# Altium PCB Proto Programmation Arduino 2.PCBDOC
Units mm, origin at the board's own origin, x right, y up, seen from the top; angles counter-clockwise.
Board outline 299.72 x 199.9 mm, 2 copper layers (Top Layer, Bottom Layer); 42 components, 65 nets, 263 pads, 17 vias.
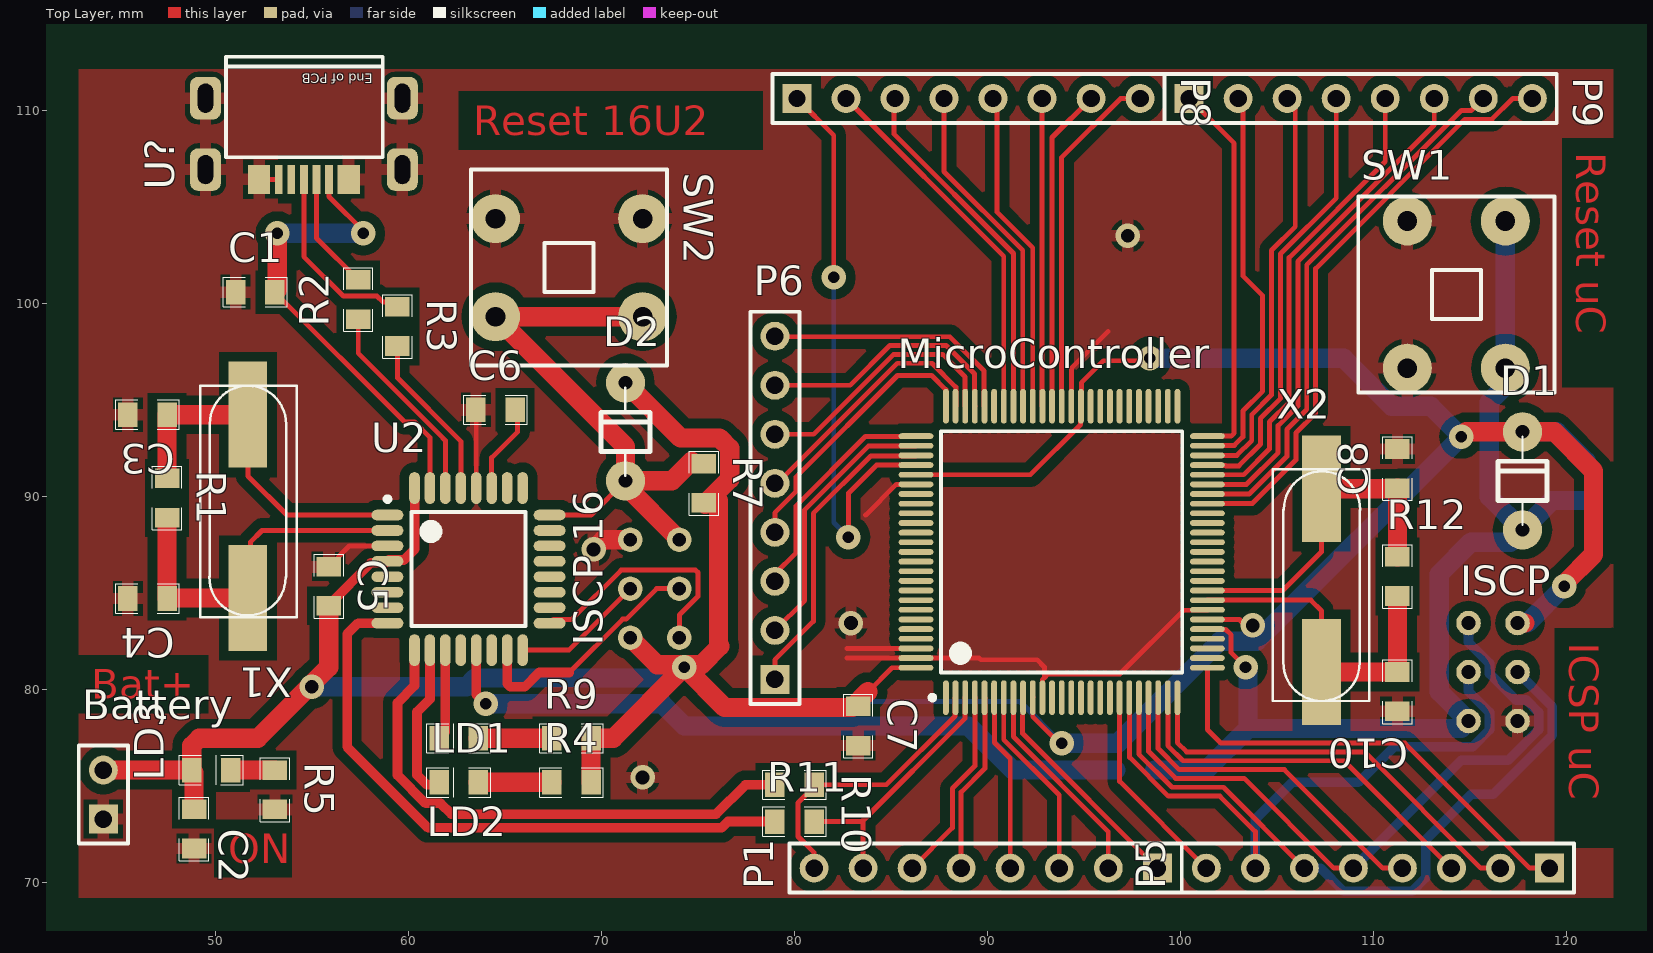
[diagram p0: Top Layer view]
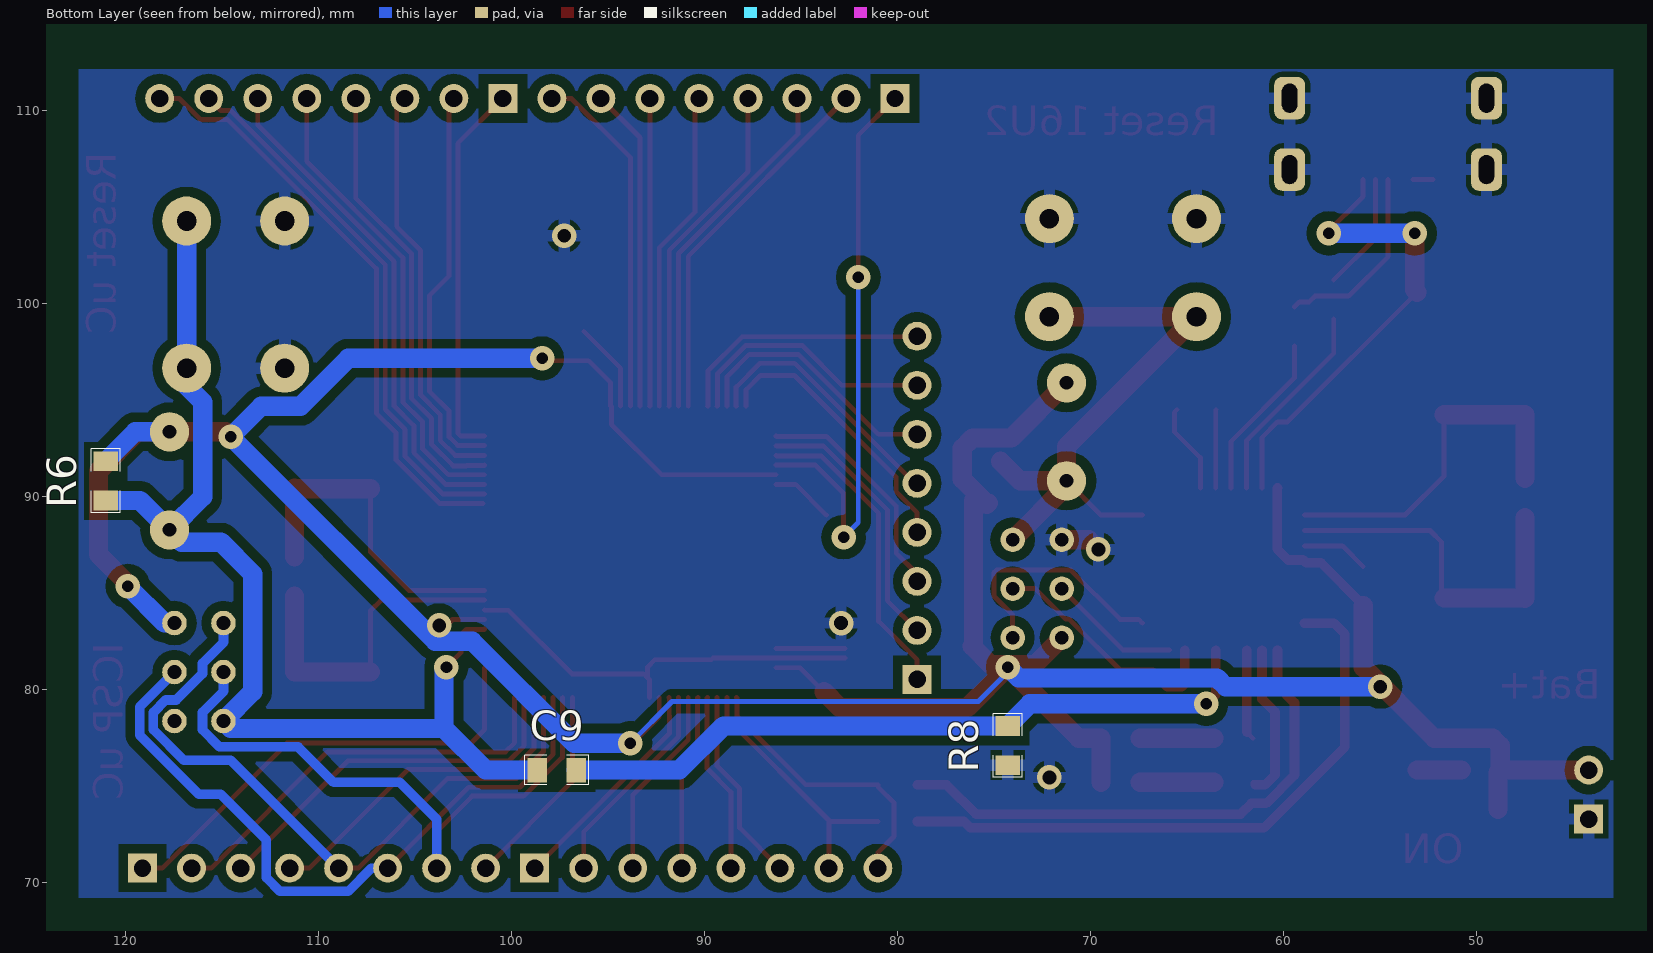
[diagram p1: Bottom Layer view, seen from below]

## Layer stack, top to bottom
Top Solder: solder mask 0.0102, Solder Resist, Dk 3.5
Top Layer: signal copper 0.0356
Dielectric1: dielectric 0.32, FR-4, Dk 4.8
Bottom Layer: signal copper 0.0356
Bottom Solder: solder mask 0.0102, Solder Resist, Dk 3.5

## Board outline
-20.497,-23.403 279.223,-23.403 279.223,176.495 -20.497,176.495

## Design rules (kind name [scope] priority, off if disabled: settings)
Clearance Clearance_bottom_polygon [OnLayer('Bottom Layer') Or OnLayer('Multi-Layer') vs OnLayer('Bottom Layer')  And  InPoly] p1: gap=0.508
Clearance Clearance_top_polygon [OnLayer('Top Layer')  Or OnLayer('Multi-Layer') vs OnLayer('Top Layer') And InPoly] p2: gap=0.508
Clearance Clearance_bottom [OnLayer('Bottom Layer') Or OnLayer('Multi-Layer') vs OnLayer('Bottom Layer')  And Not InPoly] p3: gap=0.203
Clearance Clearance_top [OnLayer('Top Layer')  Or OnLayer('Multi-Layer') vs OnLayer('Top Layer') And Not InPoly] p4: gap=0.203
Clearance Clearance_pad_to_pad [OnLayer('Multi-Layer') vs OnLayer('Multi-Layer')] p5: gap=0.254
ComponentClearance ComponentClearance_bottom [OnLayer('Bottom Overlay') vs OnLayer('Bottom Overlay')] p1: gap=0 collisioncheckmode=3 verticalgap=0.254 showdistances=FALSE
ComponentClearance ComponentClearance_top [OnLayer('Top Overlay') vs OnLayer('Top Overlay')] p2: gap=0 collisioncheckmode=3 verticalgap=0.254 showdistances=FALSE
FabricationTestPointUsage TestPointUsage [All] p1: valid=0 allowmultiple=FALSE
FabricationTestpoint Testpoint [All] p1: side=3 testpointundercomponent=TRUE minsize=1.016 maxsize=2.54 preferedsize=1.524 minholesize=0 maxholesize=1.016 preferedholesize=0.813 testpointgrid=0.025 allowsidetop=TRUE allowsidebottom=TRUE usegrid=TRUE gridtolerance=0
HoleSize [All] p1: absolutevalues=TRUE maxlimit=25.4 minlimit=0.406 maxpercent=80.000 minpercent=20.000
MinimumAnnularRing [PadXSize_AllLayers = PadYSize_AllLayers] p1: minimumring=0.203
PermittedLayers [All] p1: toplayerpermitted=TRUE bottomlayerpermitted=TRUE
PolygonConnect [All] p1: connectstyle=Relief reliefconductorwidth=0.61 reliefentries=4 polygonreliefangle="90 Angle" airgapwidth=0.254
RoutingVias [All] p1: holewidth=0.406 width=0.813 viastyle="Through Hole" minholewidth=0.4 minwidth=0.8 maxholewidth=0.6 maxwidth=10
SMDToPlane [All] p1: distance=0
SolderMaskExpansion [All] p1: expansion=0.102
ViasUnderSMD [All] p1: allowed=FALSE
Width Width_botom_top [OnLayer('Bottom Layer') or OnLayer('Top Layer')] p1: maxlimit=254 minlimit=0.254 preferedwidth=0.813 minimp=50.000000 maximp=50.000000 favimp=50.000000
25 further rules are at their usual default settings.

## Components (designator, comment, footprint, x,y, rotation, side; value= is the part's Value field where it differs from the comment)
Battery "Header 2" HDR1X2 44.196,73.279 r90 top
C1 "CAP" 0805 51.054,100.584 r0 top
C2 "CAP" 0805 48.895,73.787 r270 top
C3 "CAP" 0805 47.498,94.234 r180 top
C4 "CAP" 0805 47.498,84.709 r180 top
C5 "CAP" 0805 55.88,86.36 r270 top
C6 "CAP" 0805 63.5,94.488 r0 top
C7 "CAP" 0805 83.312,79.121 r270 top
C8 "CAP" 0805 111.252,90.424 r90 top
C9 "CAP" 0805 98.679,75.819 r180 bottom
C10 "CAP" 0805 111.252,80.899 r270 top
D1 "comment" DIODE0.2 117.729,88.265 r90 top
D2 "comment" DIODE0.2 71.247,90.805 r90 top
ISCP "ISCP Arduino" "Prog Arduino" 114.935,83.439 r0 top
"ISCP 16" "ISCP Arduino" "Prog Arduino" 74.041,82.677 r180 top
LD1 "Yellow" LED0805 61.595,75.184 r0 top
LD2 "Yellow" LED0805 61.595,77.47 r0 top
LD3 "Yellow" LED0805 50.8,75.819 r180 top
MicroController "ATmega2560-16AU" 100A_N 93.853,87.122 r90 top
P1 "Header 8" HDR1X8 98.806,70.739 r180 top
P5 "Header 8" HDR1X8 119.126,70.739 r180 top
P6 "Header 8" HDR1X8 78.994,80.518 r90 top
P8 "Header 8" HDR1X8 80.137,110.617 r0 top
P9 "Header 8" HDR1X8 100.457,110.617 r0 top
R1 "RES" 0805 47.498,90.932 r270 top
R2 "RES" 0805 57.404,99.187 r90 top
R3 "RES" 0805 59.436,99.822 r270 top
R4 "RES" 0805 67.437,75.184 r0 top
R5 "RES" 0805 53.086,75.819 r270 top
R6 "RES" 0805 121.031,89.789 r90 bottom
R7 "RES" 0805 75.311,91.694 r270 top
R8 "RES" 0805 74.295,76.073 r90 bottom
R9 "RES" 0805 67.437,77.47 r0 top
R10 "RES" 0805 78.994,75.057 r0 top
R11 "RES" 0805 78.994,73.152 r0 top
R12 "RES" 0805 111.252,84.836 r90 top
SW1 "SW_PB" KSA 111.76,104.267 r0 top
SW2 "SW_PB" KSA 72.136,104.394 r270 top
U2 "ATmega16U2-AU" 32A_N 63.119,86.233 r0 top
U? "USB microB" "USB micro B connector" 59.69,106.934 r180 top
X1 "16MHz" HC-49S-SMD 51.689,94.234 r270 top
X2 "16MHz" HC-49S-SMD 107.315,80.899 r90 top

## Footprints (in the part's own frame and the unit in brackets; to place one, negate y for a bottom-side part, rotate by r counter-clockwise, add the part's x,y. Pads: shape width x height; smd on the part's side, far side on the other; paste and mask are expansions set on the pad)
32A_N [mm] "Thin QFP, 32-Leads, Body 7x7mm, Pitch 0.8mm, IPC Medium Density"
  oval 1.65x0.55 smd: 1(-4.2,2.8) 2(-4.2,2) 3(-4.2,1.2) 4(-4.2,0.4) 5(-4.2,-0.4) 6(-4.2,-1.2) 7(-4.2,-2) 8(-4.2,-2.8) 17(4.2,-2.8) 18(4.2,-2) 19(4.2,-1.2) 20(4.2,-0.4) 21(4.2,0.4) 22(4.2,1.2) 23(4.2,2) 24(4.2,2.8)
  oval 0.55x1.65 smd: 9(-2.8,-4.2) 10(-2,-4.2) 11(-1.2,-4.2) 12(-0.4,-4.2) 13(0.4,-4.2) 14(1.2,-4.2) 15(2,-4.2) 16(2.8,-4.2) 25(2.8,4.2) 26(2,4.2) 27(1.2,4.2) 28(0.4,4.2) 29(-0.4,4.2) 30(-1.2,4.2) 31(-2,4.2) 32(-2.8,4.2)
  silkscreen extent -4.32,-2.95 2.95,3.75, body extent -3.5,-3.5 3.5,3.5, height 1.2
100A_N [mm] "Thin QFP, 100-Leads, Body 14x14mm, Pitch 0.5mm, IPC Medium Density"
  oval 1.8x0.3 smd: 1(-7.55,6) 2(-7.55,5.5) 3(-7.55,5) 4(-7.55,4.5) 5(-7.55,4) 6(-7.55,3.5) 7(-7.55,3) 8(-7.55,2.5) 9(-7.55,2) 10(-7.55,1.5) 11(-7.55,1) 12(-7.55,0.5) 13(-7.55,0) 14(-7.55,-0.5) 15(-7.55,-1) 16(-7.55,-1.5) 17(-7.55,-2) 18(-7.55,-2.5) 19(-7.55,-3) 20(-7.55,-3.5) 21(-7.55,-4) 22(-7.55,-4.5) 23(-7.55,-5) 24(-7.55,-5.5) 25(-7.55,-6) 51(7.55,-6) 52(7.55,-5.5) 53(7.55,-5) 54(7.55,-4.5) 55(7.55,-4) 56(7.55,-3.5) 57(7.55,-3) 58(7.55,-2.5) 59(7.55,-2) 60(7.55,-1.5) 61(7.55,-1) 62(7.55,-0.5) 63(7.55,0) 64(7.55,0.5) 65(7.55,1) 66(7.55,1.5) 67(7.55,2) 68(7.55,2.5) 69(7.55,3) 70(7.55,3.5) 71(7.55,4) 72(7.55,4.5) 73(7.55,5) 74(7.55,5.5) 75(7.55,6)
  oval 0.3x1.8 smd: 26(-6,-7.55) 27(-5.5,-7.55) 28(-5,-7.55) 29(-4.5,-7.55) 30(-4,-7.55) 31(-3.5,-7.55) 32(-3,-7.55) 33(-2.5,-7.55) 34(-2,-7.55) 35(-1.5,-7.55) 36(-1,-7.55) 37(-0.5,-7.55) 38(0,-7.55) 39(0.5,-7.55) 40(1,-7.55) 41(1.5,-7.55) 42(2,-7.55) 43(2.5,-7.55) 44(3,-7.55) 45(3.5,-7.55) 46(4,-7.55) 47(4.5,-7.55) 48(5,-7.55) 49(5.5,-7.55) 50(6,-7.55) 76(6,7.55) 77(5.5,7.55) 78(5,7.55) 79(4.5,7.55) 80(4,7.55) 81(3.5,7.55) 82(3,7.55) 83(2.5,7.55) 84(2,7.55) 85(1.5,7.55) 86(1,7.55) 87(0.5,7.55) 88(0,7.55) 89(-0.5,7.55) 90(-1,7.55) 91(-1.5,7.55) 92(-2,7.55) 93(-2.5,7.55) 94(-3,7.55) 95(-3.5,7.55) 96(-4,7.55) 97(-4.5,7.55) 98(-5,7.55) 99(-5.5,7.55) 100(-6,7.55)
  silkscreen extent -7.67,-6.25 6.25,6.82, body extent -7,-7 7,7, height 1.2
0805 [mil]
  rect 40x50 smd: 1(0,0) 2(80,0)
  silkscreen extent -25,-30 105,30
DIODE0.2 [mil]
  round 80 hole 28: A(0,0) K(200,0)
  silkscreen extent 10,-50 190,50
HC-49S-SMD [mm] "SMD quartz crystal"
  rect 5.5x2 smd: 1(0,0) 2(9.5,0)
  silkscreen extent -1.5,-2.48 10.5,2.52
HDR1X2 [mm] "Connector; Header; 2 Position"
  rect 1.5x1.5 hole 0.9: 1(0,0)
  round 1.5 hole 0.9: 2(2.54,0)
  silkscreen extent -1.27,-1.27 3.81,1.27
HDR1X8 [mm] "Connector; Header; 8 Position"
  rect 1.5x1.5 hole 0.9: 1(0,0)
  round 1.5 hole 0.9: 2(2.54,0) 3(5.08,0) 4(7.62,0) 5(10.16,0) 6(12.7,0) 7(15.24,0) 8(17.78,0)
  silkscreen extent -1.27,-1.27 19.05,1.27
KSA [mil]
  round 100 hole 40: 1(200,-300) 2(200,0) 3(0,0) 4(0,-300)
  silkscreen extent -100,-350 300,50
LED0805 [mil]
  rect 40x50 smd: A(80,0) K(0,0)
  silkscreen extent -25,-30 105,30
"Prog Arduino" [mm]
  round 1.27 hole 0.711 paste+0 mask+0.05: 1(0,0) 2(2.54,0) 3(0,-2.54) 4(2.54,-2.54) 5(0,-5.08) 6(2.54,-5.08)
"USB micro B connector" [mm]
  rect 0.4x1.5 smd paste+0 mask+0.05: 1(3.8,0.508) 2(4.45,0.508) 3(5.1,0.508) 4(5.75,0.508) 5(6.4,0.508)
  rrect50% 1.6x2.2 hole 0.8 slot 1.5 at 90 deg paste+0 mask+0.05: 6(0,0) 7(0,-3.7) 8(10.2,-3.7) 9(10.2,0)
  rect 1.15x1.5 smd paste+0 mask+0.05: 10(2.775,0.508) 11(7.425,0.508)
  silkscreen extent 1.02,-5.84 9.14,-0.63

## Part data
Battery: "Header, 2-Pin"
C1 C2 C3 C4 C5 C6 C7 C8 C9 C10: "capacité non polarisée"
D1 D2: library part JUNCTION_DIODE, "diode usage général"
ISCP "ISCP 16": "Programmation Port For Arduino"
LD1 LD2 LD3: library part LED, "LED 5mm/3mm/CMS"
MicroController: "8-bit AVR Microcontroller, 4.5-5.5V, 256KB Flash, 4KB EEPROM, 8KB SRAM, 86 GPIO pins, 100-pin TQFP, Industrial Grade (-40°C to 85°C), Pb-Free"
P1 P5 P6 P8 P9: "Header, 8-Pin"
R1 R2 R3 R4 R5 R6 R7 R8 R9 R10 R11 R12: "resistance"
U2: "8-bit AVR Microcontroller, 2.7-5.5V, 16KB Flash, 512 Bytes EEPROM, 512 Bytes SRAM, 32-pin TQFP, Industrial Grade (-40°C to 85°C)"
U?: "Usb female connector SMD micro B"
X1 X2: library part XTAL, "Quartz"

## Via types
v1: diameter 1.27, hole 0.6, Top Layer to Bottom Layer, 11 vias
v2: diameter 1.27, hole 0.711, Top Layer to Bottom Layer, 6 vias

## Nets (pads, with @x,y where several pads share a name; then routed paths per layer and width w, separated by ;. In a path a pad name is that pad's centre, name@x,y a point inside that pad or via, vN(x,y) a via of type N, cw(c..) or ccw(c..) an arc to the next point about the centre after c; other vN are vias at no path point)
D+: R3.1 U?.3 | length 9.9
  Top Layer w0.254: U?.3 54.59,102.423 56.632,100.381 58.369,100.381 58.674,100.076 59.182,100.076 R3.1
D-: R2.2 U?.2 | length 6.1
  Top Layer w0.254: U?.2 55.24,103.383 R2.2
DTR: C9.2 R8.2 U2.13 | length 37
  Top Layer w0.5: U2.13 63.519,79.737 v1(64.008,79.248)
  Bottom Layer w1: v1(64.008,79.248) 73.152,79.248 R8.2 89.027,78.105 91.313,75.819 C9.2
GND: "ISCP 16.6" Battery.1 C1.1 C2.2 C3.2 C4.2 C5.1 C6.1 C7.2 C8.2 C10.2 ISCP.6 MicroController.11 MicroController.32 MicroController.62 MicroController.81 MicroController.98 MicroController.99 R5.2 R8.1 SW1.3 SW1.4 SW2.3 SW2.4 U2.3 U2.28 U?.5 U?.6 U?.7 U?.8 U?.9 U?.10 U?.11 | length 44.2
  Top Layer w0.254: U?.11 U?.5 ; C5.1 56.953,87.433 U2.3 ; C6.1 63.519,94.469 U2.28 ; 82.716,81.622 MicroController.99 89.574,81.622 89.662,81.534 92.583,81.534 92.964,81.153 92.964,80.612 ; 82.724,82.122 MicroController.98 ; 83.693,89.027 85.288,90.622 MicroController.81 ; MicroController.11 92.853,80.501 92.964,80.612 ; MicroController.62 94.353,96.639 96.266,98.552 ; MicroController.32 101.383,84.102 100.173,84.102 96.873,80.802 93.154,80.802 92.964,80.612
  Top Layer w1: v2(69.596,87.249) 70.104,87.757 71.501,87.757
  other v2: 72.136,75.438 82.931,83.439 97.282,103.505
MISO: ISCP.1 MicroController.22 P5.5 | length 35.8
  Top Layer w0.254: MicroController.22 98.353,76.792 99.757,75.387 103.305,75.387 107.954,70.739 P5.5
  Bottom Layer w0.5: P5.5 114.549,76.322 116.977,76.322 118.563,77.908 118.563,78.81 117.926,79.447 117.388,79.447 116.023,80.812 116.023,81.35 114.935,82.438 ISCP.1
"MISO 16": "ISCP 16.1" U2.17 | length 12.7
  Top Layer w0.254: U2.17 67.514,83.628 68.474,83.628 71.029,86.182 74.879,86.182 75.006,86.055 75.006,84.817 74.041,83.852 74.041,82.677
MOSI: ISCP.4 MicroController.21 P5.6 | length 35.8
  Top Layer w0.254: MicroController.21 97.853,76.645 99.568,74.93 102.235,74.93 P5.6
  Bottom Layer w0.5: P5.6 107.264,70.739 108.468,69.536 112.004,69.536 112.709,70.241 112.709,72.196 115.084,74.571 116.22,74.571 119.266,77.617 119.266,79.101 117.475,80.892 ISCP.4
"MOSI 16": "ISCP 16.4" U2.16 | length 6.9
  Top Layer w0.254: U2.16 68.317,82.033 71.501,85.217
NetC3_1: C3.1 R1.1 U2.1 X1.1 | length 18.7
  Top Layer w0.254: X1.1 51.689,91.059 53.715,89.033 U2.1
  Top Layer w1: R1.1 C3.1 X1.1
NetC4_1: C4.1 R1.2 U2.2 X1.2 | length 18.7
  Top Layer w0.254: X1.2 51.816,84.861 51.816,87.63 52.419,88.233 U2.2
  Top Layer w1: R1.2 C4.1 47.523,84.734 X1.2
NetC6_2: C6.2 U2.27 | length 4.7
  Top Layer w0.254: U2.27 64.319,92.005 65.659,93.345 65.659,94.361 C6.2
NetC8_1: C8.1 MicroController.34 R12.2 X2.2 | length 17.5
  Top Layer w0.254: MicroController.34 105.315,85.122 107.315,87.122 X2.2
  Top Layer w1: X2.2 111.227,90.399 C8.1 R12.2
NetC10_1: C10.1 MicroController.33 R12.1 X2.1 | length 17.2
  Top Layer w0.254: MicroController.33 106.767,84.622 107.315,84.074 X2.1
  Top Layer w1: X2.1 C10.1 R12.1
NetLD1_A: LD1.A R4.1 | length 3.8
  Top Layer w1: LD1.A R4.1
NetLD1_K: LD1.K U2.10 | length 8.2
  Top Layer w0.254: LD1.K@61.468,75.057 LD1.K
  Top Layer w0.5: U2.10 61.119,79.502 60.452,78.835 60.452,75.565 60.96,75.057 LD1.K@61.468,75.057
NetLD2_A: LD2.A R9.1 | length 3.8
  Top Layer w1: LD2.A R9.1
NetLD2_K: LD2.K U2.11 | length 4.7
  Top Layer w0.254: LD2.K LD2.K@61.919,77.794
  Top Layer w0.5: LD2.K@61.919,77.794 U2.11
NetLD3_K: LD3.K R5.1 | length 2.3
  Top Layer w1: LD3.K R5.1
NetMicroController_4: MicroController.4 P1.6 | length 10.2
  Top Layer w0.254: P1.6 88.189,72.822 88.189,74.865 89.353,76.03 MicroController.4
NetMicroController_5: MicroController.5 P1.5 | length 9.3
  Top Layer w0.254: P1.5 88.646,74.676 89.873,75.903 89.873,79.552 MicroController.5
NetMicroController_6: MicroController.6 P1.4 | length 9.2
  Top Layer w0.254: MicroController.6 90.373,79.552 90.373,77.232 91.186,76.419 P1.4
NetMicroController_7: MicroController.7 P1.3 | length 10
  Top Layer w0.254: MicroController.7 90.853,77.399 93.726,74.526 P1.3
NetMicroController_8: MicroController.8 P1.2 | length 10.9
  Top Layer w0.254: MicroController.8 91.353,77.545 96.266,72.632 P1.2
NetMicroController_9: MicroController.9 P1.1 | length 11.7
  Top Layer w0.254: MicroController.9 91.833,79.552 91.833,78.623 91.821,78.611 91.821,77.724 P1.1
NetMicroController_19: MicroController.19 P5.8 | length 10.7
  Top Layer w0.254: MicroController.19 96.853,75.232 P5.8
NetMicroController_23: MicroController.23 P5.4 | length 17.9
  Top Layer w0.254: MicroController.23 98.853,76.938 99.947,75.844 105.388,75.844 110.494,70.739 P5.4
NetMicroController_24: MicroController.24 P5.3 | length 19.8
  Top Layer w0.254: MicroController.24 99.353,77.085 100.136,76.302 108.483,76.302 P5.3
NetMicroController_25: MicroController.25 P5.2 | length 21.8
  Top Layer w0.254: MicroController.25 99.845,79.564 99.845,77.239 100.326,76.759 109.554,76.759 115.574,70.739 P5.2
NetMicroController_26: MicroController.26 P5.1 | length 23.9
  Top Layer w0.254: MicroController.26 101.403,77.921 102.108,77.216 111.637,77.216 118.114,70.739 P5.1
NetMicroController_43: MicroController.43 P9.8 | length 30.7
  Top Layer w0.254: MicroController.43@101.473,89.642 103.739,89.642 105.985,91.888 105.985,93.286 107.01,94.311 107.01,101.803 114.744,109.537 116.144,109.537 117.225,110.617 P9.8
NetMicroController_44: MicroController.44 P9.7 | length 28
  Top Layer w0.254: MicroController.44 103.572,90.122 105.528,92.077 105.528,93.475 106.553,94.501 106.553,101.993 114.554,109.994 115.074,109.994 P9.7
NetMicroController_45: MicroController.45 P9.6 | length 26
  Top Layer w0.254: MicroController.45 103.426,90.622 105.07,92.267 105.07,93.665 106.096,94.69 106.096,102.182 113.157,109.243 P9.6
NetMicroController_46: MicroController.46 P9.5 | length 24.4
  Top Layer w0.254: MicroController.46 103.279,91.122 104.613,92.456 104.613,93.854 105.639,94.879 105.639,102.371 110.617,107.35 P9.5
NetMicroController_47: MicroController.47 P9.4 | length 22.8
  Top Layer w0.254: MicroController.47 101.423,91.602 102.352,91.602 102.375,91.579 103.032,91.579 104.156,92.703 104.156,94.043 105.181,95.069 105.181,102.561 108.077,105.456 P9.4
NetMicroController_48: MicroController.48 P9.3 | length 21.4
  Top Layer w0.254: MicroController.48 102.929,92.122 103.699,92.892 103.699,94.233 104.724,95.258 104.724,102.75 105.953,103.978 105.953,110.201 P9.3
NetMicroController_49: MicroController.49 P9.2 | length 20.5
  Top Layer w0.254: MicroController.49 101.423,92.642 102.802,92.642 103.242,93.082 103.242,94.422 104.267,95.447 104.267,100.399 103.242,101.425 103.242,110.372 P9.2
NetMicroController_50: MicroController.50 P9.1 | length 19.8
  Top Layer w0.254: P9.1 102.784,108.29 102.784,93.271 102.635,93.122 MicroController.50
NetMicroController_63: MicroController.63 P8.8 | length 18.2
  Top Layer w0.254: MicroController.63 93.853,107.565 96.905,110.617 P8.8
NetMicroController_64: MicroController.64 P8.7 | length 16.8
  Top Layer w0.254: MicroController.64 93.353,108.593 P8.7
NetMicroController_65: MicroController.65 P8.6 | length 16
  Top Layer w0.254: P8.6 92.837,94.688 MicroController.65
NetMicroController_66: MicroController.66 P8.5 | length 16.8
  Top Layer w0.254: P8.5 90.505,110.409 90.505,104.729 92.353,102.881 MicroController.66
NetMicroController_67: MicroController.67 P8.4 | length 17.6
  Top Layer w0.254: P8.4 87.757,106.83 91.833,102.754 91.833,94.692 MicroController.67
NetMicroController_68: MicroController.68 P8.3 | length 18.5
  Top Layer w0.254: P8.3 85.159,110.559 85.159,108.781 91.353,102.588 MicroController.68
NetMicroController_69: MicroController.69 P8.2 | length 19.3
  Top Layer w0.254: P8.2 90.853,102.441 MicroController.69
NetMicroController_71: MicroController.71 P6.8 | length 13.4
  Top Layer w0.254: P6.8 79.019,98.273 88.06,98.273 89.833,96.499 89.833,94.692 MicroController.71
NetMicroController_72: MicroController.72 P6.7 | length 13.5
  Top Layer w0.254: P6.7 82.896,95.758 84.954,97.815 87.87,97.815 89.333,96.352 89.333,94.692 MicroController.72
NetMicroController_73: MicroController.73 P6.6 | length 13.6
  Top Layer w0.254: P6.6 81.003,93.218 85.143,97.358 87.681,97.358 88.853,96.186 MicroController.73
NetMicroController_74: MicroController.74 P6.5 | length 13.4
  Top Layer w0.254: P6.5 79.109,90.678 85.332,96.901 87.134,96.901 88.373,95.662 88.373,95.65 ; MicroController.74 88.373,94.692 88.373,95.621
NetMicroController_75: MicroController.75 P6.4 | length 14.4
  Top Layer w0.254: P6.4 78.994,89.15 80.074,90.231 80.074,90.996 85.344,96.266 87.122,96.266 87.853,95.535 MicroController.75
NetMicroController_76: MicroController.76 P6.3 | length 12.1
  Top Layer w0.254: P6.3 78.994,85.978 80.074,87.058 80.074,89.495 83.681,93.102 86.283,93.102 MicroController.76
NetMicroController_77: MicroController.77 P6.2 | length 14
  Top Layer w0.254: P6.2 80.531,84.595 80.531,89.306 83.828,92.602 86.283,92.602 MicroController.77
NetMicroController_78: MicroController.78 P6.1 | length 16
  Top Layer w0.254: P6.1 78.994,81.53 80.989,83.525 80.989,89.117 83.974,92.102 86.283,92.102 MicroController.78
NetMicroController_79: MicroController.79 P8.1 | length 30.2
  Top Layer w0.254: P8.1 82.042,108.712 v1(82.042,101.346) ; v1(82.804,87.884) 82.804,90.17 84.256,91.622 MicroController.79
  Bottom Layer w0.254: v1(82.042,101.346) 82.042,88.646 v1(82.804,87.884)
NetR2_1: R2.1 U2.30 | length 10.6
  Top Layer w0.254: R2.1 57.404,97.421 61.576,93.248 61.576,93.237 61.919,92.894 U2.30
NetR3_2: R3.2 U2.29 | length 8.7
  Top Layer w0.254: R3.2 59.436,96.139 62.738,92.837 62.738,90.452 U2.29
NetR10_1: R10.1 U2.9 | length 27.9
  Top Layer w0.5: U2.9 60.319,80.19 59.436,79.307 59.436,75.559 60.899,74.096 61.667,74.096 62.23,73.533 75.946,73.533 77.47,75.057 R10.1
NetR11_1: R11.1 U2.8 | length 32.2
  Top Layer w0.5: U2.8 57.398,83.433 56.833,82.868 56.833,77.025 61.028,72.83 76.237,72.83 76.559,73.152 R11.1
RESET: C9.1 D1.A ISCP.5 MicroController.30 R6.1 SW1.1 SW1.2 | length 58.9
  Top Layer w0.254: MicroController.30 101.423,83.102 102.352,83.102 102.633,82.821 102.633,81.898 v1(103.378,81.153) ; ISCP.5@114.935,77.978 ISCP.5 ISCP.5@115.062,78.359
  Top Layer w1: SW1.1@116.84,95.718 SW1.1
  Bottom Layer w1: C9.1 101.346,75.819 103.505,77.978 ; v1(103.378,81.153) 103.505,81.026 103.505,77.978 ; SW1.1@116.84,95.718 116.01,94.887 116.01,89.984 D1.A ; SW1.1 SW1.2 ; R6.1 119.253,89.789 D1.A ; 103.505,77.978 114.554,77.978 ISCP.5 113.411,79.883 113.411,85.979 115.062,87.63 117.094,87.63 D1.A
"RESET 16": "ISCP 16.5" D2.A R7.1 SW2.1 SW2.2 U2.24 | length 31.6
  Top Layer w0.254: U2.24 69.475,89.033 D2.A D2.A@71.247,90.551
  Top Layer w1: D2.A@71.247,90.551 74.041,87.757 ; SW2.2 SW2.1 71.247,92.583 D2.A 73.66,90.805 R7.1@74.676,91.821
SCK: ISCP.3 MicroController.20 P5.7 | length 33.1
  Top Layer w0.254: MicroController.20 97.373,79.552 97.373,76.479 99.379,74.473 102.046,74.473 103.886,72.632 P5.7
  Bottom Layer w0.5: P5.7 103.886,73.279 105.791,75.184 109.22,75.184 111.061,77.025 115.14,77.025 116.023,77.908 116.023,78.81 114.935,79.898 ISCP.3
"SCK 16": "ISCP 16.3" U2.15 | length 12.8
  Top Layer w0.254: 68.337,80.878 71.101,83.642 71.291,83.642 72.866,85.217 74.041,85.217
  Top Layer w0.5: U2.15 65.119,80.296 65.278,80.137 66.04,80.137 66.781,80.878 68.337,80.878
SELIAL_RX: MicroController.2 P1.8 R10.2 | length 14.8
  Top Layer w0.254: P1.8 81.026,71.542 80.188,72.38 80.188,74.117 81.026,74.955 R10.2 84.767,75.057 88.333,78.623 88.333,79.552 MicroController.2
SERIAL_TX: MicroController.3 P1.7 R11.2 | length 13.6
  Top Layer w0.254: R11.2 83.509,73.152 ; P1.7 83.566,73.095 83.509,73.152 ; MicroController.3 88.833,79.552 88.833,78.477 83.509,73.152
VCC5V: "ISCP 16.2" Battery.2 C2.1 C5.2 C7.1 D1.K D2.K ISCP.2 LD3.A MicroController.10 MicroController.31 MicroController.61 MicroController.80 MicroController.100 R4.2 R6.2 R7.2 R9.2 U2.4 U2.32 | length 204
  Top Layer w0.254: 83.82,79.883 85.059,81.122 MicroController.100 ; MicroController.80 92.232,91.122 94.833,93.723 94.833,94.652 MicroController.61 94.873,94.692 94.873,95.889 96.012,97.028 98.298,97.028 v1(98.425,97.155) ; MicroController.10@92.373,79.592 MicroController.10 92.353,78.589 93.853,77.089 v1(93.853,77.216) ; MicroController.31 103.068,83.622 v2@103.505,83.185
  Top Layer w0.5: C5.2 55.88,84.374 58.067,86.561 58.847,86.561 U2.4 58.991,86.705 59.771,86.705 60.325,87.259 60.325,90.427 U2.32
  Top Layer w1: Battery.2 LD3.A ; C2.1 48.895,75.692 LD3.A ; C5.2 55.88,81.153 52.197,77.47 49.169,77.47 48.778,77.079 48.778,75.829 LD3.A ; R4.2 R9.2 70.612,77.47 v1(74.295,81.153) 76.383,79.065 83.002,79.065 83.82,79.883 ; D2.K 74.108,93.024 76.118,93.024 76.649,92.493 76.649,90.895 75.416,89.662 R7.2 R7.2@75.379,89.594 ; 71.501,82.677 72.898,81.28 75.184,81.28 76.136,82.233 ; 76.073,82.296 76.073,89.767 ; v1(114.554,93.091) 114.808,93.345 D1.K 119.38,93.345 121.412,91.313 121.412,86.995 119.888,85.471 v1(119.888,85.344) ; ISCP.2 ISCP.2@117.856,83.439
  Bottom Layer w0.254: v1(74.295,81.153) 74.295,80.899 75.819,79.375 91.694,79.375 v1(93.853,77.216)
  Bottom Layer w1: v2(54.991,80.137) 63.004,80.137 63.454,80.586 73.728,80.586 v1(74.295,81.153) ; v1(93.853,77.216) 96.765,77.216 102.04,82.491 103.954,82.491 v1(114.554,93.091) 112.971,94.674 110.943,94.674 108.461,97.155 v1(98.425,97.155) ; ISCP.2 117.983,83.439 v1(119.888,85.344) ; D1.K 119.507,93.345 R6.2
  other v2: 103.759,83.312
"VCC5V USB": C1.2 U2.31 U?.1 | length 25
  Top Layer w0.254: C1.2 59.817,93.853 60.325,93.853 61.119,93.059 U2.31 ; U?.1 55.89,105.527 57.785,103.632 v1(57.658,103.632)
  Top Layer w1: C1.2 53.213,100.711 v1(53.213,103.632)
  Bottom Layer w1: v1(53.213,103.632) v1(57.658,103.632)
pads on no net: MicroController.1 MicroController.12 MicroController.13 MicroController.14 MicroController.15 MicroController.16 MicroController.17 MicroController.18 MicroController.27 MicroController.28 MicroController.29 MicroController.35 MicroController.36 MicroController.37 MicroController.38 MicroController.39 MicroController.40 MicroController.41 MicroController.42 MicroController.51 MicroController.52 MicroController.53 MicroController.54 MicroController.55 MicroController.56 MicroController.57 MicroController.58 MicroController.59 MicroController.60 MicroController.70 MicroController.82 MicroController.83 MicroController.84 MicroController.85 MicroController.86 MicroController.87 MicroController.88 MicroController.89 MicroController.90 MicroController.91 MicroController.92 MicroController.93 MicroController.94 MicroController.95 MicroController.96 MicroController.97 U2.5 U2.6 U2.7 U2.12 U2.14 U2.18 U2.19 U2.20 U2.21 U2.22 U2.23 U2.25 U2.26 U?.4

## Polygon pours and split planes (outlines as drawn)
GND on Bottom Layer "Bottom Layer-No Net" (solid, pour order 4): 42.926,112.141 122.428,112.141 122.428,69.215 42.926,69.215 42.926,112.141
GND on Top Layer "Bottom Layer-No Net" (solid, pour order 6): 42.926,112.141 122.428,112.141 122.428,69.215 42.926,69.215 42.926,112.141

## Keep-outs
Keep-Out Layer:
  rectangle: -19.537,-19.743 -14.537,180.257
  rectangle: -14.537,-19.743 275.463,-14.743
  rectangle: 270.463,-14.743 275.463,180.257
  rectangle: -14.537,175.257 270.463,180.257

## Other copper
Top Layer:
  text "Reset 16U2" at 63.373,108.712 h1.52
  text "Reset uC" at 120.523,107.823 h1.52 r270
  text "ICSP uC" at 120.142,82.423 h1.52 r270
  text "Bat+" at 43.561,79.502 h1.52
  text "ON" at 50.673,70.993 h1.52

## Silkscreen, mask and mechanical layers (free items; w line width, h text height)
Mechanical 1:
  lines w0.2: 42.799,69.088 42.799,112.268 122.555,112.268 122.555,69.088 42.799,69.088

## Text inside footprints (layer, text, board x,y; h text height)
U?: Top Overlay "End of PCB" at 58.166,111.887 h0.5 r180